# Altium PCB T1_MODIFYV2_0831.PCBDOC (part 3 of 3)
Units mm, origin at the board's own origin, x right, y up, seen from the top; angles counter-clockwise.
Board outline 155.78 x 129.36 mm, 2 copper layers (Top Layer, Bottom Layer); 121 components, 221 nets, 819 pads, 620 vias.
Unrouted connection lines stored in the file: 4.
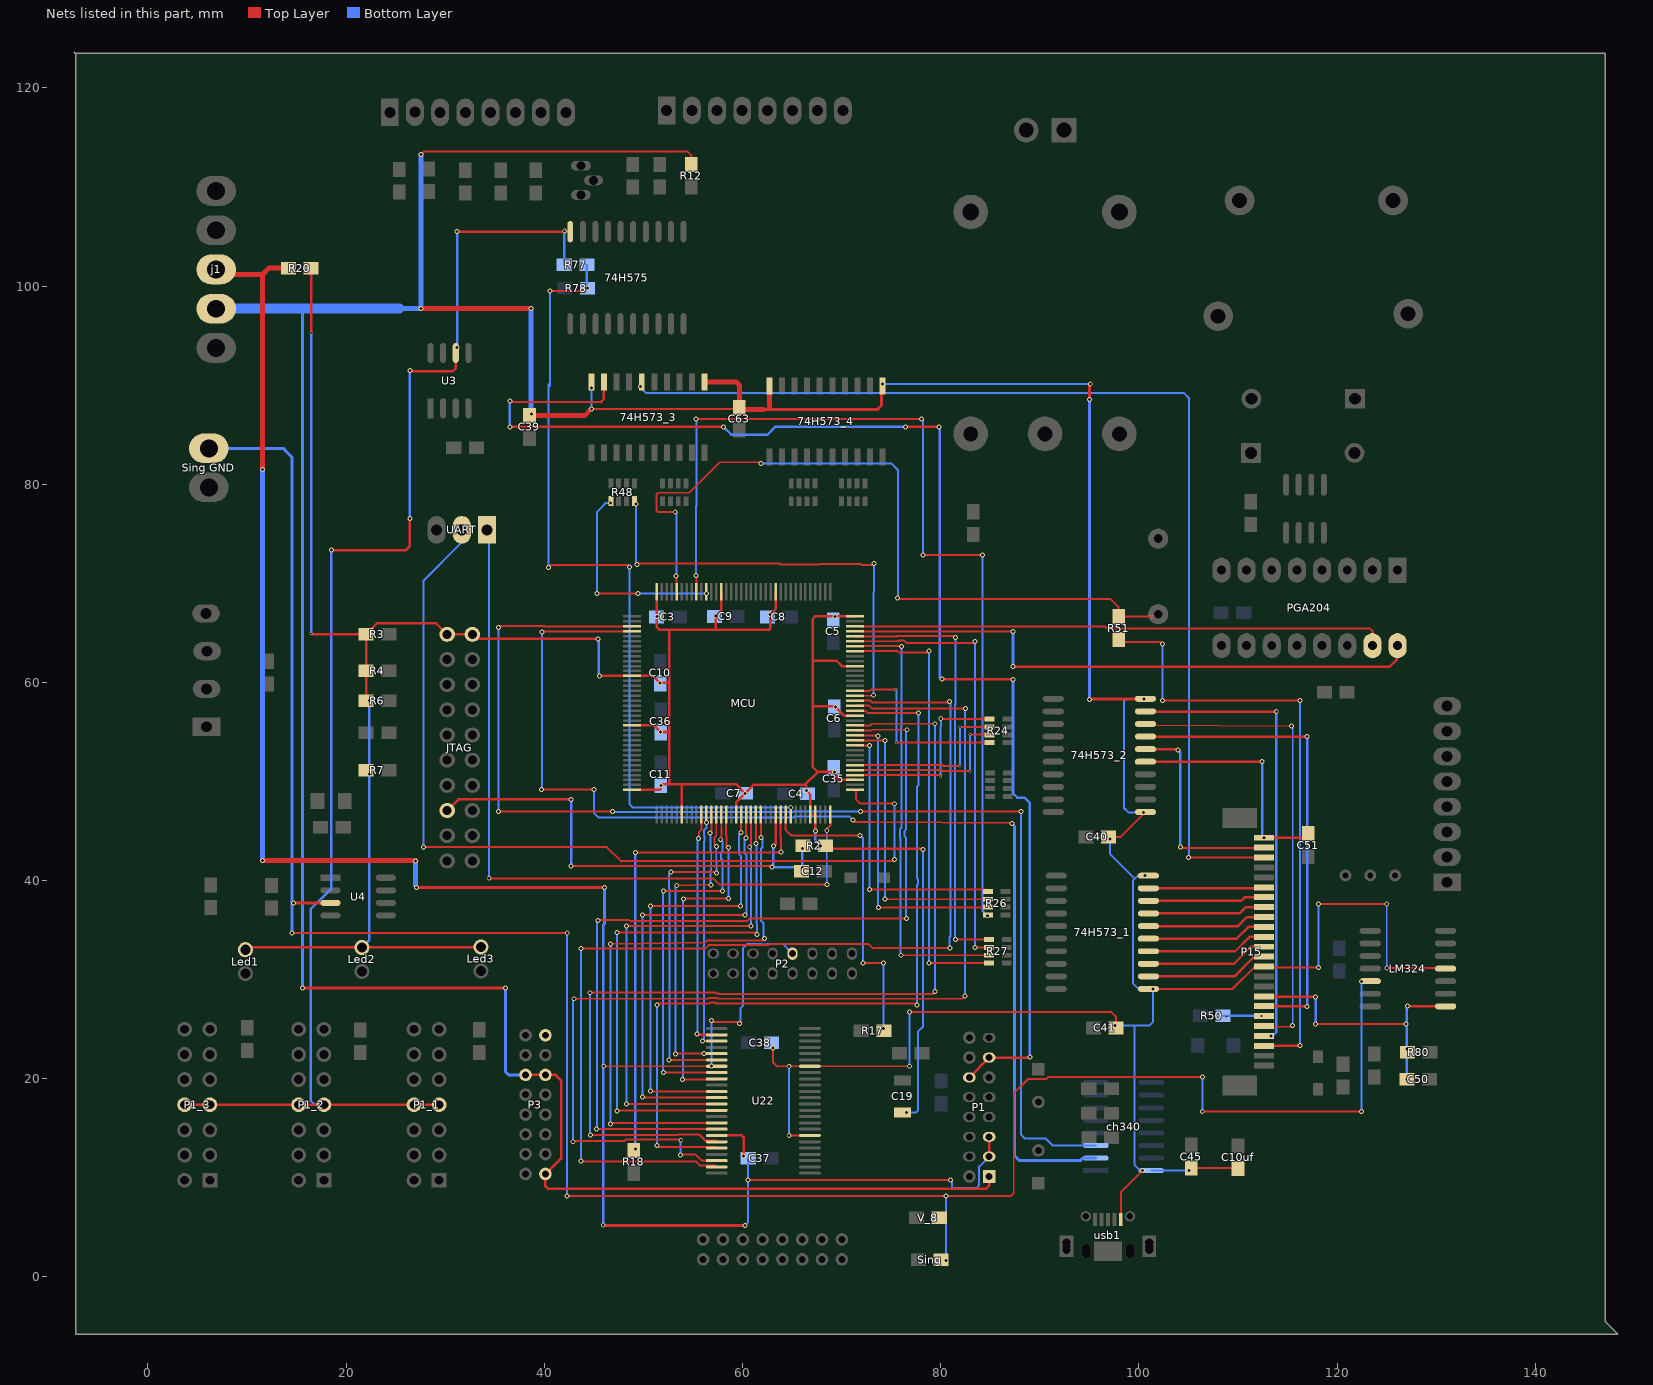
[diagram p3: the nets of this part, all layers, seen from the top]

## Via types
v1: diameter 0.5, hole 0.3, Top Layer to Bottom Layer, 606 vias
v2: diameter 0.3, hole 0.2, Top Layer to Bottom Layer, 14 vias

## Nets (pads, with @x,y where several pads share a name; then routed paths per layer and width w, separated by ;. In a path a pad name is that pad's centre, name@x,y a point inside that pad or via, vN(x,y) a via of type N, cw(c..) or ccw(c..) an arc to the next point about the centre after c; other vN are vias at no path point) (continued)
OS_0: C37.1 j1.3 P1.3 P1.5 P2.23 R20.2 U22.31 U22.42 | length 228.1
  Top Layer w0.2: v1(45.999,21.26) U22.31@57.404,21.26 ; v1(56.896,25.857) 57.04,25.714 59.884,25.714 ; v1(60.579,9.779) v1(81.001,9.779)
  Top Layer w0.254: R20.2@14.021,101.803 R20.2@14.173,101.803 ; U22.42@57.404,14.275 59.919,14.275 60.122,14.072 v1(60.122,12.192) ; P1.3@84.896,12.138 P1.5@84.896,14.138
  Top Layer w0.3: v1(27.102,39.299) 34.188,39.299 v1(46.095,39.299) ; v1(45.949,5.232) 45.999,5.182 v1@60.249,5.182
  Top Layer w0.5: j1.3@6.883,101.671 7.387,101.168 10.033,101.168 11.557,101.168 ; v1(11.557,42.012) v1@27.051,42.012 ; v1(11.557,81.483) 11.557,101.168 ; R20.2@14.021,101.803 12.192,101.803 11.557,101.168
  Bottom Layer w0.2: v1@27.02,39.299 v1(27.102,39.299) ; v1(56.896,21.285) 56.896,22.174 v1(56.896,25.857) ; 59.823,25.775 59.823,27.123 60.046,27.346 60.046,33.147 60.48,33.581 61.932,33.581 61.98,33.534 62.48,33.534 62.528,33.581 64.094,33.581 P2.23@65.048,32.627 ; v1(60.249,5.207) 60.579,5.537 v1(60.579,9.779) 60.579,10.516 C37.1@60.579,11.963 ; v1(81.001,9.779) 81.128,9.652 81.128,9.068 81.229,8.966 83.617,8.966 83.885,9.235 83.885,11.127 P1.3@84.896,12.138
  Bottom Layer w0.3: v1@45.898,5.182 v1(45.949,5.232) 45.949,35.519 46.095,35.665 v1(46.095,39.299)
  Bottom Layer w0.5: v1(11.557,42.012) 11.557,76.352 ; 11.557,73.889 11.557,76.352 ; v1(11.557,81.483) 11.557,76.352 ; v1@27,39.477 v1(27,41.986)
  other v1: 59.69,25.552
PB0: MCU.46 R26.1 | length 28
  Top Layer w0.2: MCU.46@71.358,53.651 v1(72.841,53.651) ; v1(72.841,39.11) 84.563,39.11 R26.1@84.76,38.913
  Bottom Layer w0.2: v1(72.841,39.11) 72.841,43.561 72.841,45.872 72.841,46.863 72.841,48.666 v1(72.841,53.651)
PB0_Y: 74H573_1.19 P15.6 | length 11.6
  Top Layer w0.254: 74H573_1.19@100.967,39.218 P15.6@112.531,39.218
PB1: MCU.47 R26.2 | length 29.4
  Top Layer w0.2: MCU.47@71.358,54.151 v1(74.373,54.151) ; v1@74.373,38.113 77.241,38.113 R26.2@84.76,38.113
  Bottom Layer w0.2: v1(74.373,38.149) v1(74.373,54.151)
PB1_Y: 74H573_1.18 P15.7 | length 11.8
  Top Layer w0.254: 74H573_1.18@100.967,37.948 110.338,37.948 110.709,38.319 P15.7@112.632,38.319
PB2: MCU.48 R26.3 | length 30.6
  Top Layer w0.2: MCU.48@71.358,54.651 v1@73.619,54.651 ; v1(73.711,37.287) R26.3@84.734,37.287
  Bottom Layer w0.2: v1(73.66,54.61) 73.66,37.897 73.66,37.338 v1(73.711,37.287)
PB2_Y: 74H573_1.17 P15.8 | length 11.9
  Top Layer w0.254: 74H573_1.17@100.967,36.678 110.16,36.678 110.801,37.319 P15.8@112.632,37.319
PB3: MCU.100 R26.4 | length 96.6
  Top Layer w0.2: v1(55.323,86.587) v1(78.056,86.587) v1@78.105,86.538 ; MCU.100@55.358,69.151 v1@55.358,70.753 ; v1@78.181,72.847 v1(78.207,72.873) v1(84.226,72.873) v1@84.15,72.949
  Bottom Layer w0.2: v1(55.323,70.788) 55.323,71.73 55.323,77.792 55.376,77.845 55.376,86.534 v1(55.323,86.587) ; v1(78.207,72.873) 78.207,78.41 v1@78.207,86.436 ; v1@84.23,72.873 84.23,39.7 84.23,36.928 v1(84.709,36.449)
PB3_Y: 74H573_1.16 P15.9 | length 12
  Top Layer w0.254: 74H573_1.16@100.967,35.408 110.007,35.408 110.919,36.319 P15.9@112.632,36.319
PB4: MCU.68 R27.1 | length 44.2
  Top Layer w0.2: MCU.68@71.358,64.651 75.55,64.651 75.592,64.693 81.287,64.693 v1@81.329,64.651 ; v1(81.509,34.061) 82.652,34.061 R27.1@84.887,34.061
  Bottom Layer w0.2: v1(81.509,34.061) 81.44,34.13 81.44,57.752 81.503,57.814 81.503,64.699 v1(81.509,64.541)
PB4_Y: 74H573_1.15 P15.10 | length 12.2
  Top Layer w0.254: 74H573_1.15@100.967,34.138 109.88,34.138 111.062,35.319 P15.10@112.632,35.319
PB5: MCU.67 R27.2 | length 44.6
  Top Layer w0.2: MCU.67@71.358,64.151 75.692,64.151 75.78,64.239 76.281,64.239 76.563,63.957 83.255,63.957 v1@83.449,64.151 ; v1(83.477,33.261) R27.2@84.887,33.261
  Bottom Layer w0.2: v1@83.439,64.16 v1(83.477,64.122) v1(83.477,33.261)
PB5_Y: 74H573_1.14 P15.11 | length 12.3
  Top Layer w0.254: 74H573_1.14@100.967,32.868 109.728,32.868 111.18,34.319 P15.11@112.632,34.319
PB6: MCU.66 R27.3 | length 44.9
  Top Layer w0.2: MCU.66@71.358,63.651 76.015,63.651 v1(76.031,63.635) ; v1(75.997,32.461) R27.3@84.887,32.461
  Bottom Layer w0.2: v1(75.997,32.461) 75.957,32.501 75.957,44.213 75.879,44.291 75.879,45.168 76.031,45.32 76.031,54.121 75.977,54.174 75.977,55.47 76.031,55.523 v1(76.031,63.635)
PB6_Y: 74H573_1.13 P15.12 | length 12.4
  Top Layer w0.254: 74H573_1.13@100.967,31.598 109.576,31.598 111.297,33.319 P15.12@112.632,33.319
PB7: MCU.65 R27.4 | length 45.1
  Top Layer w0.2: MCU.65@71.358,63.151 75.661,63.151 75.78,63.031 v1@78.703,63.031 ; v1(78.842,31.674) 78.854,31.661 81.509,31.661 R27.4@84.887,31.661 R27.4@84.798,31.75
  Bottom Layer w0.2: v1(78.842,31.674) 78.842,55.554 78.822,55.573 78.822,56.074 78.842,56.094 78.842,60.452 v1(78.842,63.17)
PB7_Y: 74H573_1.12 P15.13 | length 12.5
  Top Layer w0.254: 74H573_1.12@100.967,30.328 109.657,30.328 111.649,32.319 P15.13@112.632,32.319
PF0: MCU.10 U22.26 | length 24.2
  Top Layer w0.2: v1@55.626,44.298 55.627,44.908 55.855,45.135 MCU.10@55.858,46.651
  Top Layer w0.254: v1(55.41,24.524) 55.702,24.435 U22.26@57.404,24.435
  Bottom Layer w0.2: v1@55.397,24.536 55.443,24.582 55.443,44.176 v1@55.397,44.221
  other v1: 55.55,44.247
PF1: MCU.11 U22.27 | length 23.7
  Top Layer w0.2: v1(55.956,23.825) 57.379,23.825 U22.27@57.404,23.8
  Bottom Layer w0.2: v1(55.956,23.825) 56.094,23.963 56.094,43.937 56.154,43.997 56.154,44.497 56.114,44.537 56.114,45.056 56.363,45.304 v1(56.363,45.872)
PF2: MCU.12 U22.29 | length 32.4
  Top Layer w0.2: v1(53.238,22.504) 53.264,22.53 U22.29@57.404,22.53 ; v1(53.365,39.497) 56.845,39.599 v1(56.82,39.573) ; v1(56.718,44.806) 56.82,44.704 56.858,44.704 MCU.12@56.858,46.651 MCU.12@56.839,46.632
  Bottom Layer w0.2: v1(53.238,22.504) 53.238,39.573 v1(53.365,39.497) ; v1(56.718,44.806) 56.82,44.704 56.775,44.659 56.775,42.955 56.848,42.881 56.848,41.091 56.775,41.017 56.775,39.796 56.845,39.599 v1(56.82,39.573)
  other v1: 56.134,22.53
PF3: MCU.13 U22.30 | length 34.1
  Top Layer w0.2: v1(52.603,21.869) 57.379,21.869 U22.30@57.404,21.895 ; v1(52.781,40.843) 57.302,40.843 v1(57.379,40.767) ; v1@57.353,43.282 v1@57.353,43.51 ; MCU.13@57.353,45.872 57.353,44.542 57.181,44.37 57.181,43.682 v1@57.353,43.51 ; v1(57.379,43.459) 57.379,43.485 v1@57.353,43.51
  Bottom Layer w0.2: v1(52.603,21.869) 52.623,21.889 52.623,39.188 52.603,39.208 52.603,40.665 v1(52.781,40.843) ; v1(57.379,40.767) 57.353,43.51 57.379,43.485 v1(57.379,43.459)
PF4: MCU.14 U22.32 | length 37.6
  Top Layer w0.2: v1(52.019,20.625) 55.651,20.625 U22.32@57.404,20.625 ; v1(52.019,38.938) 57.099,38.938 57.963,38.938 v1(57.983,38.958) ; MCU.14@57.858,46.651 57.858,45.314 57.878,45.295 v1@57.878,44.145
  Bottom Layer w0.2: v1(52.019,20.625) 51.999,20.645 51.999,38.918 v1(52.019,38.938) ; v1(57.785,44.12) 57.983,43.922 57.983,43.561 57.983,43.205 57.983,42.955 57.833,42.805 57.833,42.216 57.983,42.066 v1(57.983,38.958)
PF5: MCU.15 U22.33 | length 34.1
  Top Layer w0.2: v1(53.924,19.914) 57.328,19.914 U22.33@57.404,19.99 ; v1(54.051,38.151) 54.102,38.202 v1(58.598,38.202) ; MCU.15@58.344,45.872 58.344,44.593 58.404,44.533 58.404,44.416 58.398,44.409 58.398,43.336 58.401,43.332 v1(58.598,43.332)
  Bottom Layer w0.2: v1@53.975,20.091 53.975,38.075 v1(54.051,38.151) ; v1(58.598,38.202) 58.598,40.513 v1(58.598,43.332)
PF6: MCU.18 U22.35 | length 43.2
  Top Layer w0.2: v1(50.698,18.745) 50.927,18.72 U22.35@57.404,18.72 ; v1(50.698,37.414) v1(59.817,37.414) ; v1(59.842,44.856) MCU.18@59.842,45.898
  Bottom Layer w0.2: v1(50.698,18.745) v1(50.698,37.414) ; 59.639,44.45 59.645,44.444 ; v1(59.817,37.414) 59.842,37.44 59.842,42.497 59.645,42.694 59.645,44.659 v1(59.842,44.856)
PF7: MCU.19 U22.36 | length 46.8
  Top Layer w0.2: v1(49.891,18.141) 49.948,18.085 U22.36@57.404,18.085 ; v1(49.891,36.531) 60.319,36.531 60.314,36.525 v1(60.249,36.525) ; MCU.19@60.358,46.651 60.358,44.738 60.396,44.7 v1@60.396,44.298
  Bottom Layer w0.2: v1(49.891,18.141) v1(49.891,36.531) ; v1(60.249,36.525) 60.421,36.697 60.421,42.56 60.204,42.777 60.204,44.125 v1(60.376,44.298)
PF8: MCU.20 U22.37 | length 50.3
  Top Layer w0.2: v1(48.294,17.433) 48.311,17.45 U22.37@57.404,17.45 ; v1(48.294,35.424) v1(60.875,35.424) ; v1(60.731,43.383) 60.858,43.405 MCU.20@60.858,45.923
  Bottom Layer w0.2: v1(48.294,17.433) v1(48.294,35.424) ; v1(60.731,43.383) 60.858,43.028 60.875,43.011 v1(60.875,35.424)
PF9: MCU.21 U22.38 | length 54.3
  Top Layer w0.2: v1(47.32,16.764) 47.371,16.815 50.495,16.815 U22.38@57.404,16.815 ; v1(47.32,34.747) 59.588,34.747 61.29,34.747 v1(61.479,34.558) ; v1(61.358,43.731) MCU.21@61.358,46.651
  Bottom Layer w0.2: v1(47.32,16.764) 47.32,24.232 v1(47.32,34.747) ; 61.462,35.691 61.42,35.733 61.42,43.584 v1@61.462,43.626 ; v1(61.479,34.558) 61.479,35.674
PF10: MCU.22 U22.40 | length 56.9
  Top Layer w0.2: v1(46.685,15.443) 46.528,15.545 47.117,15.545 U22.40@57.404,15.545 ; v1(46.685,33.604) 56.202,33.731 56.406,33.935 61.341,33.935 62.098,33.935 62.23,34.067 v1(62.23,34.138) ; v1(61.849,44.323) MCU.22@61.849,45.796
  Bottom Layer w0.2: v1(46.685,15.443) 46.685,21.793 v1(46.685,33.604) ; v1(61.849,44.323) 62.001,44.171 62.001,43.339 61.874,43.212 61.874,35.921 62.128,35.667 62.128,34.239 v1(62.23,34.138)
PF11: MCU.49 U22.41 | length 88.9
  Top Layer w0.2: v1(45.288,14.935) 57.379,14.935 U22.41@57.404,14.91 ; v1@45.491,36.009 45.511,36.028 48.544,36.028 48.651,35.921 60.499,35.921 60.753,36.175 67.285,36.175 v1(76.561,36.175) ; MCU.49@71.358,55.151 73.032,55.151 73.101,55.22 v1(76.581,55.22)
  Bottom Layer w0.2: v1(45.288,14.935) 45.314,14.961 45.314,35.839 v1(45.441,35.966) ; v1(76.561,36.175) 76.51,36.226 76.51,44.301 76.333,44.479 76.333,44.98 76.51,45.157 76.51,55.149 v1(76.581,55.22)
PF12: MCU.50 U22.43 | length 97.5
  Top Layer w0.2: v1(44.628,28.677) 44.653,28.702 57.261,28.702 57.375,28.588 57.649,28.588 57.682,28.555 75.768,28.555 79.203,28.555 v1(79.446,28.798) ; v1(44.679,14.326) 44.695,14.342 45.027,14.342 45.038,14.331 45.564,14.331 45.575,14.342 53.442,14.342 ; 53.522,14.396 55.614,14.396 56.242,13.768 57.275,13.768 U22.43@57.404,13.64 ; MCU.50@71.358,55.651 71.375,55.668 72.908,55.668 73.063,55.824 77.617,55.824 ; 77.628,55.824 v1(79.426,55.824)
  Bottom Layer w0.2: v1(44.628,28.677) 44.628,14.351 44.653,14.326 v1(44.679,14.326) ; v1(79.426,55.824) 79.446,55.804 v1(79.446,28.798)
PF13: MCU.53 U22.44 | length 82.9
  Top Layer w0.2: v1(51.359,13.284) 51.51,13.133 57.275,13.133 U22.44@57.404,13.005 ; v1(51.359,27.457) 51.359,27.584 51.379,27.604 56.697,27.604 56.773,27.68 57.273,27.68 57.349,27.604 59.182,27.604 77.526,27.604 77.622,27.508 v1(77.622,27.457) ; MCU.53@71.358,57.151 71.377,57.132 72.405,57.132 72.612,56.925 v1@77.746,56.925
  Bottom Layer w0.2: v1(51.359,13.284) v1(51.359,27.457) ; v1(77.622,27.457) 77.622,39.532 77.718,39.628 77.718,40.128 77.622,40.224 77.622,49.47 77.769,49.617 v1@77.769,56.89
  other v1: 77.775,56.896
PF14: MCU.54 U22.46 | length 110.9
  Top Layer w0.2: v1(42.901,13.64) 42.982,13.722 48.095,13.722 48.262,13.888 51.609,13.888 51.63,13.867 v1@53.748,13.867 ; v1(43.002,28.073) 56.523,28.073 56.585,28.134 57.461,28.134 57.523,28.073 82.199,28.073 v1(82.46,28.334) ; v1(53.746,12.294) 53.823,12.37 55.245,12.37 55.88,11.735 U22.46@57.404,11.735 ; MCU.54@71.358,57.651 72.781,57.651 73.053,57.379 v1(82.525,57.379)
  Bottom Layer w0.2: v1(42.901,13.64) 42.901,16.408 42.901,27.971 v1(43.002,28.073) ; v1(53.746,12.294) 53.746,13.818 v1(53.772,13.792) ; v1(82.46,28.334) 82.46,57.314 v1(82.525,57.379)
PF15: MCU.55 U22.47 | length 107.4
  Top Layer w0.2: v1(43.688,11.709) 43.763,11.635 45.39,11.635 55.338,11.635 55.744,11.228 U22.47@57.275,11.228 ; v1(43.688,33.127) 56.24,33.127 56.594,33.481 62.594,33.481 62.729,33.616 72.683,33.616 73.127,33.172 v1(80.95,33.172) ; U22.47@56.871,11.049 U22.47@56.871,11.228 ; MCU.55@71.358,58.151 72.923,58.151 73.085,57.988 v1@80.823,57.988
  Bottom Layer w0.2: v1(43.688,33.127) 43.713,33.102 43.713,31.394 v1@43.713,11.735 ; v1(80.95,33.172) 80.905,33.218 80.905,34.312 80.971,34.378 v1@80.971,57.992
  other v1: 80.899,58.064
RD-7606: 74H573_3.19 P1.12 P1.13 | length 136.5
  Top Layer w0.2: v1@36.623,88.294 45.724,88.294
  Top Layer w0.254: v1(36.525,85.776) v1(58.09,85.776) ; v1(36.525,88.392) v1@36.623,88.294 ; 45.724,88.294 45.999,88.57 74H573_3.19@45.999,90.018 ; v1(76.454,85.776) v1(79.832,85.776) ; v1(80.137,60.325) 80.162,60.3 v1(87.3,60.3) ; P1.12@82.896,20.138 P1.13@84.896,22.138 v1@88.94,22.138
  Bottom Layer w0.254: v1(36.525,85.776) v1(36.525,88.392) ; v1(58.09,85.776) 58.877,84.988 61.62,84.988 62.509,84.988 63.297,85.776 v1(76.454,85.776) ; v1(79.832,85.776) 79.927,85.681 79.927,70.536 79.927,60.535 v1(80.137,60.325) ; v1(87.3,60.3) 87.3,48.793 87.732,48.362 88.468,48.362 89.002,47.828 89.002,45.923 v1(89.002,22.2)
RD-7606_8: MCU.98 R48.1 | length 21
  Top Layer w0.2: v1(45.314,68.986) v1(49.454,68.986)
  Bottom Layer w0.2: v1(45.314,68.986) 45.314,77.191 45.758,77.635 46.228,78.105 v1(46.685,78.105) ; v1(49.454,68.986) 54.661,68.986 v1(56.363,68.986)
RD-OUT: MCU.27 R17.2 | length 31.2
  Top Layer w0.2: MCU.27@64.358,46.651 64.358,45.09 64.897,44.552 v1(71.882,44.552) ; v1(72.161,31.699) v1(74.219,31.699) v1@74.346,31.699
  Bottom Layer w0.2: v1(71.882,44.552) 72.161,44.272 v1(72.161,31.699) v1@72.161,31.598 ; v1(74.219,25.07) v1(74.219,31.699)
RD-OUT1: 74H573_2.16 P15.2 | length 21.8
  Top Layer w0.254: 74H573_2.16@100.662,53.264 v1@103.835,53.264 ; v1(104.191,43.409) 104.089,43.409 104.142,43.283 112.619,43.332 P15.2@112.632,43.319
  Bottom Layer w0.254: v1@103.962,53.162 104.191,52.934 v1(104.191,43.409)
  other v1: 103.937,53.162
READ: MCU.57 R24.4 | length 19
  Top Layer w0.2: MCU.57@71.358,59.151 72.825,59.151 72.978,59.303 75.494,59.303 v2(75.514,59.284) ; v2(75.527,53.912) R24.4@84.938,53.912
  Bottom Layer w0.2: v2(75.514,59.284) 75.527,59.271 75.527,58.801 75.527,58.141 75.527,55.661 75.523,55.658 75.523,53.915 v2(75.527,53.912)
REF_SELECT: P3.34
RESET: C12.2 JTAG.15 MCU.25 R2.1 | length 50.3
  Top Layer w0.2: v1@42.717,41.474 62.717,41.474
  Top Layer w0.254: JTAG.15@30.201,47.066 31.332,48.197 v1(42.709,48.197) ; v1(42.709,41.466) v1@42.717,41.474 ; 62.717,41.474 v1(62.961,41.36) ; v1(63.115,43.506) 63.271,43.663 63.358,43.663 MCU.25@63.358,46.651
  Bottom Layer w0.254: v1(42.709,41.466) v1(42.709,48.197) ; v1(62.961,41.36) v1@66.005,41.36 ; v1@63.115,41.514 v1(63.115,43.506) ; v1(66.04,41.326) v1(66.04,43.256)
RFTB: 74H575.20 P1_1.7 P1_1.8 P1_2.7 P1_2.8 P1_3.7 P1_3.8 R77.2 U3.6 | length 142.7
  Top Layer w0.254: P1_3.8@3.708,17.374 P1_3.7@6.248,17.374 P1_2.8@15.215,17.374 P1_2.7@17.755,17.374 23.419,17.374 P1_1.8@26.848,17.374 P1_1.7@29.388,17.374 ; v1(18.517,73.355) 23.343,73.355 25.146,73.355 26.035,73.355 26.441,73.762 v1(26.441,76.556) ; v1(26.441,91.465) 26.492,91.415 30.785,91.415 31.064,91.694 U3.6@31.064,93.243 ; v1(31.193,105.488) 34.163,105.488 74H575.20@42.621,105.488
  Bottom Layer w0.254: P1_2.7@17.755,17.374 16.84,17.374 16.434,17.78 16.434,37.135 18.517,39.218 v1(18.517,73.355) ; v1(26.441,76.556) 26.441,83.972 26.441,85.09 26.441,86.868 v1(26.441,91.465) ; v1(31.193,93.775) 31.193,103.784 ; 31.193,104.14 31.193,103.784 ; v1(31.193,105.488) 31.193,104.267 31.193,103.784 ; R77.2@42.012,102.133 42.012,105.512 v1(42.062,105.562)
RST_LCD: 74H573_2.15 C51.1 P15.1 | length 23.3
  Top Layer w0.254: 74H573_2.15@100.662,51.994 v1(112.446,51.994) ; v1(112.632,44.319) C51.1@116.684,44.319
  Bottom Layer w0.254: 112.446,44.506 v1(112.446,51.994)
RX: ch340.2 MCU.112 | length 117.5
  Top Layer w0.2: v1(39.726,49.174) v1(45.034,49.174) ; v1(39.751,65.1) 39.783,65.132 MCU.112@48.839,65.132 ; v1(71.145,46.101) 71.323,45.923 73.177,45.911 87.153,45.816 v1(87.217,45.752)
  Bottom Layer w0.2: v1@39.745,49.194 v1@39.745,65.1 ; v1(45.034,49.174) 45.034,46.812 45.46,46.386 65.171,46.386 65.261,46.476 70.028,46.476 70.77,46.476 v1(71.145,46.101)
  Bottom Layer w0.3: v1(87.217,45.752) 87.452,45.517 87.452,12.243 87.961,11.734 94.095,11.734 94.35,11.989 ch340.2@95.656,11.989
SING: "Sing GND.2" LM324.12 Sing.1 U4.3 | length 229
  Top Layer w0.2: v1(14.529,34.696) v1(42.316,34.696) ; v1(42.297,8.148) 43.078,8.148 87.066,8.148 87.376,8.458 87.376,18.517 88.833,19.974 90.647,19.974 90.835,20.162 v1(106.406,20.162) ; v1(106.401,16.688) v1(122.453,16.688)
  Top Layer w0.3: v1(14.681,37.744) U4.3@18.415,37.744
  Bottom Layer w0.2: v1(42.297,8.148) 42.297,34.677 v1(42.316,34.696) ; v1(80.543,1.651) v1(80.543,8.153) ; v1(106.401,16.688) 106.401,20.156 v1(106.406,20.162) ; v1(122.453,16.688) v1(122.453,29.794)
  Bottom Layer w0.3: 6.147,83.617 13.716,83.617 13.716,83.541 14.529,82.728 v1(14.529,34.696)
SN_OE: MCU.26 R18.2 | length 47.5
  Top Layer w0.2: v1(49.2,42.824) v1@63.881,42.824 ; MCU.26@63.856,45.822 v1(63.881,42.875)
  Bottom Layer w0.254: v1(49.2,12.903) 49.177,39.421 49.176,40.945 v1(49.2,42.824)
SPI1_NSS: MCU.40 R24.1 | length 19.5
  Top Layer w0.2: MCU.40@71.358,50.651 79.915,50.651 v2(80.008,50.558) ; v1(80.008,56.335) 80.031,56.312 R24.1@84.938,56.312
  Bottom Layer w0.2: v2(80.008,50.558) 79.963,50.603 79.963,55.507 80.03,55.573 80.03,56.074 80.008,56.096 v1(80.008,56.335)
SPI1_SCK: MCU.41 R24.3 | length 17.3
  Top Layer w0.2: MCU.41@71.358,51.151 80.032,51.151 80.07,51.112 80.096,51.112 80.146,51.062 v2(82.964,51.062) ; v2(82.964,54.729) R24.3@84.92,54.729
  Bottom Layer w0.2: v2(82.964,51.062) 82.964,53.289 v2(82.964,54.729)
SPI1_SO: MCU.42 R24.2 | length 17.5
  Top Layer w0.2: MCU.42@71.358,51.651 80.174,51.651 80.258,51.566 v2(81.944,51.566) ; v2(81.944,55.452) 82.004,55.512 83.287,55.512 R24.2@84.938,55.512
  Bottom Layer w0.2: v2(81.944,51.566) 81.944,52.959 v2(81.944,55.452)
STAD1: MCU.28 R77.1 R78.2 | length 83.3
  Top Layer w0.2: v1(40.437,71.603) 40.691,71.857 48.006,71.857 48.412,71.857 v1(48.616,71.653) ; v1(40.589,99.496) 44.048,99.496
  Top Layer w0.254: 44.048,99.496 v1(44.348,99.797)
  Bottom Layer w0.2: v1(40.437,71.603) 40.437,90.068 40.589,90.221 ; 40.589,89.916 40.589,90.221 ; v1(40.589,99.496) 40.589,90.221 ; v1(48.616,71.653) 48.616,47.701 48.946,47.371 v1(64.872,47.371)
  Bottom Layer w0.254: R77.1@44.298,102.133 44.298,101.041 44.298,99.847 R78.2@44.374,99.771
TSCK: 74H573_2.17 P15.18 | length 47.5
  Top Layer w0.254: 74H573_2.17@101.067,54.534 v1(116.992,54.534) ; P15.18@112.674,27.33 116.967,27.33 v1(116.992,27.305)
  Bottom Layer w0.254: v1(116.992,27.305) v1(116.992,54.534)
TSCS: 74H573_2.19 P15.21 | length 46
  Top Layer w0.254: 74H573_2.19@101.117,57.048 v1(113.868,57.048)
  Bottom Layer w0.254: v1@113.157,24.232 113.411,24.232 113.868,24.689 v1(113.868,57.048)
  other v1: 113.35,24.323
TSDI: 74H573_2.18 P15.20 | length 47.2
  Top Layer w0.15: 74H573_2.18@101.041,55.677 v1(115.392,55.575) ; P15.20@112.979,25.248 115.392,25.248 v1(115.519,25.375)
  Bottom Layer w0.15: v1(115.392,55.575) 115.519,55.372 v1(115.519,25.375)
TSDO: P15.19 R50.1 | length 3.9
  Bottom Layer w0.254: R50.1@108.509,26.34 v2(112.37,26.34)
  other v2: 108.864,26.264
TSINT: P15.22 R51.1 | length 61.8
  Top Layer w0.2: R51.1@98.095,64.059 102.21,64.059 v1(102.387,63.881) ; v1(102.387,58.191) v1(116.281,58.191)
  Top Layer w0.254: P15.22@113.259,23.343 v1(116.281,23.343)
  Bottom Layer w0.2: v1(102.387,58.191) v1(102.387,63.881) ; v1(116.281,23.343) v1(116.281,58.191)
TSINT1: MCU.104 R51.2 | length 78
  Top Layer w0.2: v1(53.213,77.191) 51.511,77.191 51.314,77.388 51.314,78.949 51.502,79.137 54.644,79.137 57.722,82.214 61.728,82.214 v1(61.849,82.093) ; MCU.104@53.358,69.151 v1@53.358,70.67 ; v1@75.641,68.428 89.56,68.428 97.13,68.428 97.968,67.589 R51.2@97.968,67.081 ; R51.2@97.942,66.853 R51.2@98.247,66.853 ; R51.2@97.968,66.624 102.006,66.624
  Bottom Layer w0.2: v1(53.213,77.191) 53.322,77.082 53.322,70.771 v1(53.289,70.739) ; v1(61.849,82.093) 75.006,82.093 75.717,81.382 v1@75.717,68.58
  other v1: 75.667,68.529
TX: ch340.3 MCU.111 | length 125.6
  Top Layer w0.2: v1(35.382,46.99) v1(46.888,46.99) ; v1(35.382,65.557) 35.529,65.704 38.746,65.704 38.781,65.67 39.466,65.67 39.501,65.704 40.001,65.704 40.055,65.651 MCU.111@48.858,65.651 ; v1(71.907,46.99) v1(88.087,46.99)
  Bottom Layer w0.2: v1(35.382,46.99) v1(35.382,65.557) ; v1(46.888,46.99) 46.961,46.917 65.06,46.917 65.133,46.99 v1(71.907,46.99) ; v1(88.087,46.99) 88.087,43.815 88.087,14.376 88.494,13.97 90.627,13.97 91.338,13.259 ch340.3@95.656,13.259
USART2_RX: MCU.37 UART.2 | length 92.8
  Top Layer w0.2: v1(27.813,43.383) 46.304,43.383 47.701,41.986 75.336,41.986 75.463,42.113 v1(75.336,42.113) ; MCU.37@71.476,49.149 71.476,48.158 71.882,47.752 v1(75.336,47.752)
  Bottom Layer w0.2: v1@27.813,43.205 27.813,70.282 31.674,74.143 UART.2@31.674,75.387 ; v1(75.336,42.113) v1(75.336,47.752)
USART2_TX: MCU.36 UART.1 | length 75.8
  Top Layer w0.2: v1@34.519,40.157 34.564,40.203 57.089,40.203 57.693,39.599 68.504,39.599 v1(68.529,39.624) ; v1@68.504,45.216 68.885,45.597 MCU.36@68.885,45.949
  Bottom Layer w0.2: UART.1@34.214,75.387 34.442,75.159 v1(34.442,40.234) ; v1(68.504,45.034) 68.504,39.649 v1(68.529,39.624)
V_8: V_8.1
VC5: MCU.70 PGA204.15 | length 53.3
  Top Layer w0.2: MCU.70@71.933,65.634 76.302,65.634 96.596,65.634 96.799,65.43 123.342,65.43 123.571,65.202 PGA204.15@123.571,63.703
VC6: MCU.69 PGA204.16 | length 59.1
  Top Layer w0.2: MCU.69@71.958,65.151 v1(87.3,65.151)
  Top Layer w0.254: v1(87.3,61.595) 87.321,61.574 125.302,61.574 126.035,62.306 PGA204.16@126.035,63.475
  Bottom Layer w0.254: v1(87.3,61.595) v1(87.3,65.151)
VCC: 74H573_1.11 74H573_1.20 74H573_2.11 74H573_2.20 74H573_3.11 74H573_3.20 74H573_4.11 74H573_4.20 C10uf.1 C38.1 C39.2 C40.2 C41.2 C45.1 C63.2 ch340.16 j1.2 LM324.4 P1.1 P3.37 P3.38 P3.48 P15.14 R12.1 U22.7 U22.18 usb1.1 | length 523.3
  Top Layer w0.2: v1(27.557,113.261) 27.859,113.563 54.458,113.563 54.839,113.182 R12.1@54.839,112.268 ; v1(44.755,87.605) C63.2@59.715,87.605 ; v1(63.094,23.114) 63.094,21.641 63.475,21.26 U22.18@66.802,21.26 v1(76.835,21.26) ; v1(64.718,14.275) U22.7@66.523,14.275 ; v1(76.835,26.721) 97.231,26.721 97.714,26.238 C41.2@97.714,25.121 ; C40.2@97.612,44.374 98.122,44.374 74H573_2.11@100.662,46.914 ; usb1.1@98.176,6.071 98.176,6.756 98.176,8.539 v1(100.355,10.719) ; 74H573_1.11@100.967,29.058 109.423,29.058 111.685,31.319 P15.14@112.632,31.319 112.709,31.242 v1(118.135,31.242) ; C45.1@105.308,10.998 C10uf.1@109.931,10.998 ; v1(118.135,37.617) v1(125.019,37.617) ; v1(125.019,31.191) LM324.4@130.658,31.191
  Top Layer w0.254: P3.37@38.11,20.388 41.131,20.388 41.732,19.787 41.732,12.01 P3.48@40.11,10.388 40.11,9.166 40.361,8.915 64.338,8.915 84.607,8.915 84.896,9.204 P1.1@84.896,10.138
  Top Layer w0.3: v1(15.621,29.146) v1(36.106,29.146) ; 62.103,87.554 73.66,87.554 74.042,87.935 74H573_4.11@74.042,89.357 ; v1(95.021,58.293) v1@95.021,58.343 ; v1(95.021,88.544) v1@95.021,90.043 ; v1@95.022,58.344 74H573_2.20@100.662,58.344
  Top Layer w0.5: v1(27.557,97.711) v1(38.656,97.711) ; C39.2@38.506,86.919 44.069,86.919 v1(44.755,87.605) ; 74H573_3.11@56.185,90.316 59.366,90.316 59.715,89.967 59.715,87.681 59.842,87.554 62.103,87.554 ; 62.713,87.681 74H573_4.20@62.713,89.91
  Bottom Layer w0.2: v1@44.78,87.63 44.78,88.595 v1(44.78,89.713) ; v1(64.718,14.275) v1(64.718,21.258) ; v1(74.143,90.119) v1(95.098,90.119) ; v1(76.835,21.26) 76.835,25.273 v1(76.835,26.721) ; v1(97.104,44.171) 97.104,42.656 99.586,40.175 ; v1(97.612,25.349) 101.067,25.349 101.448,25.73 101.448,29.134 99.873,29.134 99.39,29.616 99.39,39.98 99.898,40.488 v1(100.609,40.488) ; 99.543,25.298 99.543,11.303 ch340.16@100.127,10.719 ; v1(100.457,46.888) 98.933,46.888 98.501,47.32 98.501,58.09 98.755,58.344 v1(100.508,58.344) ; ch340.16@101.256,10.719 v1(105.054,10.719) ; v1(118.135,31.242) v1(118.135,37.617) ; v1(125.019,31.191) v1(125.019,37.617)
  Bottom Layer w0.3: v1(15.621,29.146) 15.621,97.711 ; v1(36.106,29.146) 36.106,20.688 36.407,20.388 P3.37@38.11,20.388 ; v1(95.021,58.293) 95.021,86.893 v1(95.021,88.544)
  Bottom Layer w0.5: 25.375,97.711 v1(27.557,97.711) v1(27.557,113.261) ; v1(38.656,97.711) 38.656,87.15 v1(38.71,87.097)
  Bottom Layer w1: j1.2@6.883,97.711 15.621,97.711 ; 15.265,97.711 15.621,97.711 ; 25.375,97.711 15.621,97.711
  other v1: 101.448,29.058
VCC3.3: C3.2 C4.2 C5.2 C6.2 C7.2 C8.2 C9.2 C10.2 C11.2 C19.1 C35.2 C36.2 JTAG.1 JTAG.2 Led1.1 Led2.1 Led3.1 MCU.6 MCU.17 MCU.32 MCU.33 MCU.39 MCU.52 MCU.62 MCU.72 MCU.84 MCU.95 MCU.108 MCU.121 MCU.131 MCU.144 R2.2 R3.1 R4.1 R6.1 R7.1 R20.1 | length 279.3
  Top Layer w0.254: Led1.1@9.677,33.274 14.732,33.274 28.245,33.274 Led3.1@33.858,33.274 ; v2(16.459,64.922) 16.51,64.872 R3.1@22.022,64.872 ; v2(16.459,95.275) R20.1@16.459,101.803 ; R6.1@22.022,58.141 R4.1@22.022,61.163 R3.1@22.022,64.872 ; JTAG.2@32.741,64.846 JTAG.1@30.201,64.846 29.083,65.964 23.114,65.964 R3.1@22.022,64.872 ; JTAG.2@32.791,64.592 32.995,64.389 36.601,64.389 v1(45.441,64.389) ; v1@45.568,60.651 MCU.121@48.858,60.651 50.957,60.651 v1(51.664,59.944) 52.578,59.944 ; v1(45.568,60.655) v1@45.568,60.681 ; MCU.131@48.858,55.651 51.08,55.651 v1(51.74,54.991) 52.502,54.991 ; 49.759,49.143 51.632,49.143 51.765,49.276 v1(51.765,49.606) 51.892,49.733 52.629,49.733 ; MCU.108@51.358,69.151 v1(51.358,66.649) 51.358,65.558 51.613,65.303 62.662,65.303 62.789,65.43 v1(62.789,66.853) 63.358,67.422 MCU.84@63.358,69.151 ; 52.629,65.202 52.629,49.733 ; MCU.6@53.858,46.651 53.858,49.693 53.899,49.733 ; 57.302,65.329 v1(57.302,66.675) 57.858,67.231 MCU.95@57.858,69.151 ; MCU.17@59.358,46.651 59.358,47.877 v1(60.274,48.793) ; v1(67.358,45.011) MCU.33@67.358,46.651 MCU.32@66.858,46.651 66.858,48.661 v1(66.446,49.073) 66.446,49.555 66.323,49.678 ; R2.2@68.428,43.231 v1@78.232,43.231 ; v1@69.266,57.607 67.107,57.607 ; v1@69.342,57.531 v1(69.367,57.531) 70.248,56.651 MCU.52@71.358,56.651 ; MCU.62@70.637,61.62 70.077,61.62 70.052,61.646 70.028,61.646 69.494,62.179 67.107,62.179 ; MCU.39@71.358,50.151 69.76,50.151 69.291,50.619 v1(69.291,50.978) 67.564,50.978 ; MCU.72@71.358,66.651 v1(69.341,66.651) 67.337,66.651 67.107,66.421 67.107,62.179 ; 52.629,49.733 53.899,49.733 ; 53.899,49.733 59.334,49.733 v1(60.274,48.793) ; v1(60.274,48.793) 61.159,49.678 66.323,49.678 ; 66.323,49.678 67.564,50.919 67.564,50.978 ; 67.107,57.607 67.107,62.179 ; 67.107,57.607 67.107,51.435 67.564,50.978
  Bottom Layer w0.2: v1(76.53,16.586) 77.495,16.586 77.699,16.789 77.699,24.74 78.232,25.273 v1(78.232,43.155)
  Bottom Layer w0.254: v2(16.459,64.922) 16.459,73.33 16.459,77.47 16.459,78.029 v2(16.459,95.275) ; Led2.1@21.59,33.249 22.352,34.011 v1(22.352,58.166) ; v1(45.441,64.389) 45.517,64.313 45.517,60.706 v1(45.568,60.655) ; v1(67.358,45.011) 67.358,44.021 v1(67.894,43.485)
  other v1: 22.352,50.775
VO: C50.2 LM324.1 P15.17 R80.2 | length 27.7
  Top Layer w0.2: v1(117.831,25.502) v1(126.975,25.502)
  Top Layer w0.254: P15.17@112.954,28.27 v1(117.831,28.27) ; v1(127.102,27.33) LM324.1@130.622,27.33
  Bottom Layer w0.254: v1(117.831,25.502) v1(117.831,28.27) ; v1(127.051,19.939) v1(127.051,22.987) 127.051,25.476 127.051,26.441 v1@127.051,27.28
WR-OUT: 74H573_3.16 P15.3 | length 109.9
  Top Layer w0.2: v1(105.032,42.319) P15.3@112.632,42.319
  Bottom Layer w0.2: v1(49.708,89.865) 49.708,89.764 50.292,89.179 56.998,89.179 80.137,89.179 89.383,89.179 101.016,89.179 104.572,89.179 105.054,88.697 105.054,86.106 105.054,42.342 v1(105.032,42.319)
WRITE: MCU.56 R48.4 | length 45.4
  Top Layer w0.2: v1(49.378,71.882) 49.479,71.984 63.728,71.984 63.8,71.912 67.824,71.912 67.839,71.927 71.948,71.927 72.038,71.837 73.107,71.837 v1(73.254,71.984) ; MCU.56@71.358,58.651 73.18,58.651 v1(73.228,58.699)
  Bottom Layer w0.2: v1(49.251,77.978) 49.254,77.114 49.266,74.447 49.276,71.984 v1(49.378,71.882) ; v1(73.228,58.699) 73.243,66.294 v1(73.254,71.984)
pads on no net: ch340.9 ch340.10 ch340.11 ch340.12 ch340.13 ch340.14 ch340.15 CT2.0 CT3.3 CT3.4 CT3.5 CT3.6 CT3.8 D4.A D4.K JTAG.11 JTAG.17 JTAG.19 LED4.1 LED4.2 LM324.5 LM324.6 LM324.7 LM324.8 LM324.9 LM324.10 MCU.3 MCU.4 MCU.5 MCU.7 MCU.8 MCU.9 MCU.23 MCU.24 MCU.29 MCU.34 MCU.35 MCU.44 MCU.58 MCU.59 MCU.60 MCU.63 MCU.64 MCU.73 MCU.87 MCU.88 MCU.89 MCU.96 MCU.102_ADBURY MCU.106 MCU.113 MCU.124 MCU.125 MCU.126 MCU.127 MCU.128 MCU.129 MCU.132 MCU.137 MCU.139 MCU.140 MCU.142 P1.6 P1.7 P1.8 P3.39 P15.0 P15.23 P15.24 PGA204.1 PGA204.2 PGA204.3 PGA204.6 PGA204.7 PGA204.9 R70.0 U3.1 U3.5 U3.8 U4.1 U4.5 U4.8 U64.1 U64.5 U64.8 usb1.0 usb1.4 usb1.6 Y2.
copper on no net: | length 123.9
  Top Layer w0.2: 66.882,46.637 cw(c67.361,46.36) 67.361,46.914 66.878,46.914 cw(c66.878,46.399) 67.334,46.638
  Top Layer w0.3: 39.599,6.172 39.624,6.147
  Bottom Layer w0.2: v1@54.356,68.453 v1(54.401,68.498) 71.933,68.498 ; 111.481,89.027 111.481,98.476
  Bottom Layer w0.254: 57.429,117.958 57.429,117.704 58.039,117.094
  Bottom Layer w0.5: v1(1.067,6.579) 1.067,62.713 ; 83.388,107.168 88.494,112.274 88.494,115.138 ; 93.345,115.392 93.345,112.141 98.196,107.29 ; 109.906,108.89 111.481,107.315 111.481,104.953 111.481,101.676 111.481,98.095 ; 121.765,104.724 121.765,106.093 124.308,108.636 125.654,108.636

## Polygon pours and split planes (outlines as drawn)
GND on Bottom Layer "Top Layer-No Net 1" (solid, pour order 1001): 50.749,67.183 69.444,67.183 69.571,67.056 69.672,66.954 69.672,48.235 51.003,48.235 50.749,48.489 50.749,67.183
GND on Bottom Layer "Top Layer-No Net 1" (solid, pour order 1000): 53.137,67.031 53.645,66.523 69.088,66.523 69.088,49.555 69.012,49.479 68.758,49.225 51.968,49.225 51.968,66.98 51.994,67.005 52.019,67.031 53.137,67.031

## Other copper
Top Layer:
  rectangle net GND_D1: 0.787,58.014 3.683,81.331
  rectangle net GND_D1: 1.651,76.835 9.652,81.331
  rectangle net GND_D1: 0.787,54.661 13.081,60.604
Bottom Layer:
  rectangle net GND: 18.923,116.51 25.044,118.466
  rectangle net GND: 18.923,111.887 20.777,118.466
  rectangle net GND: 0.813,111.887 20.777,113.589
  rectangle net GND: 0.813,62.459 3.327,113.589
  rectangle net GND: 0.711,62.408 7.163,67.285

## Silkscreen, mask and mechanical layers (free items; w line width, h text height)
Top Overlay:
  text "RX" at 23.47,74.676 h1.2
  text "2016.08.30" at 75.971,69.52 h2
  text "T1_ModifyV2" at 75.921,64.846 h2
  text "RS" at 73.66,45.999 h1.2
  text "TS" at 73.66,42.926 h1.2
Mechanical 1:
  lines w0.254: 140,-0.051 140,121 -0.025,121 -0.025,-0.051 140.03,-0.051

## Text inside footprints (layer, text, board x,y; h text height)
P1_1: Top Overlay "2" at 27.356,6.706 h1.27 r90; Top Overlay "1" at 29.896,6.706 h1.27 r90; Top Overlay "14" at 27.356,27.026 h1.27 r90; Top Overlay "13" at 29.896,27.026 h1.27 r90
P1_2: Top Overlay "2" at 15.723,6.706 h1.27 r90; Top Overlay "1" at 18.263,6.706 h1.27 r90; Top Overlay "14" at 15.723,27.026 h1.27 r90; Top Overlay "13" at 18.263,27.026 h1.27 r90
P1_3: Top Overlay "2" at 4.216,6.706 h1.27 r90; Top Overlay "1" at 6.756,6.706 h1.27 r90; Top Overlay "14" at 4.216,27.026 h1.27 r90; Top Overlay "13" at 6.756,27.026 h1.27 r90